# Altium PCB MSP430_Task.PcbDoc
Units mm, origin at the board's own origin, x right, y up, seen from the top; angles counter-clockwise.
Board outline 70 x 50 mm, 2 copper layers (Top Layer, Bottom Layer); 20 components, 13 nets, 152 pads, 25 vias.
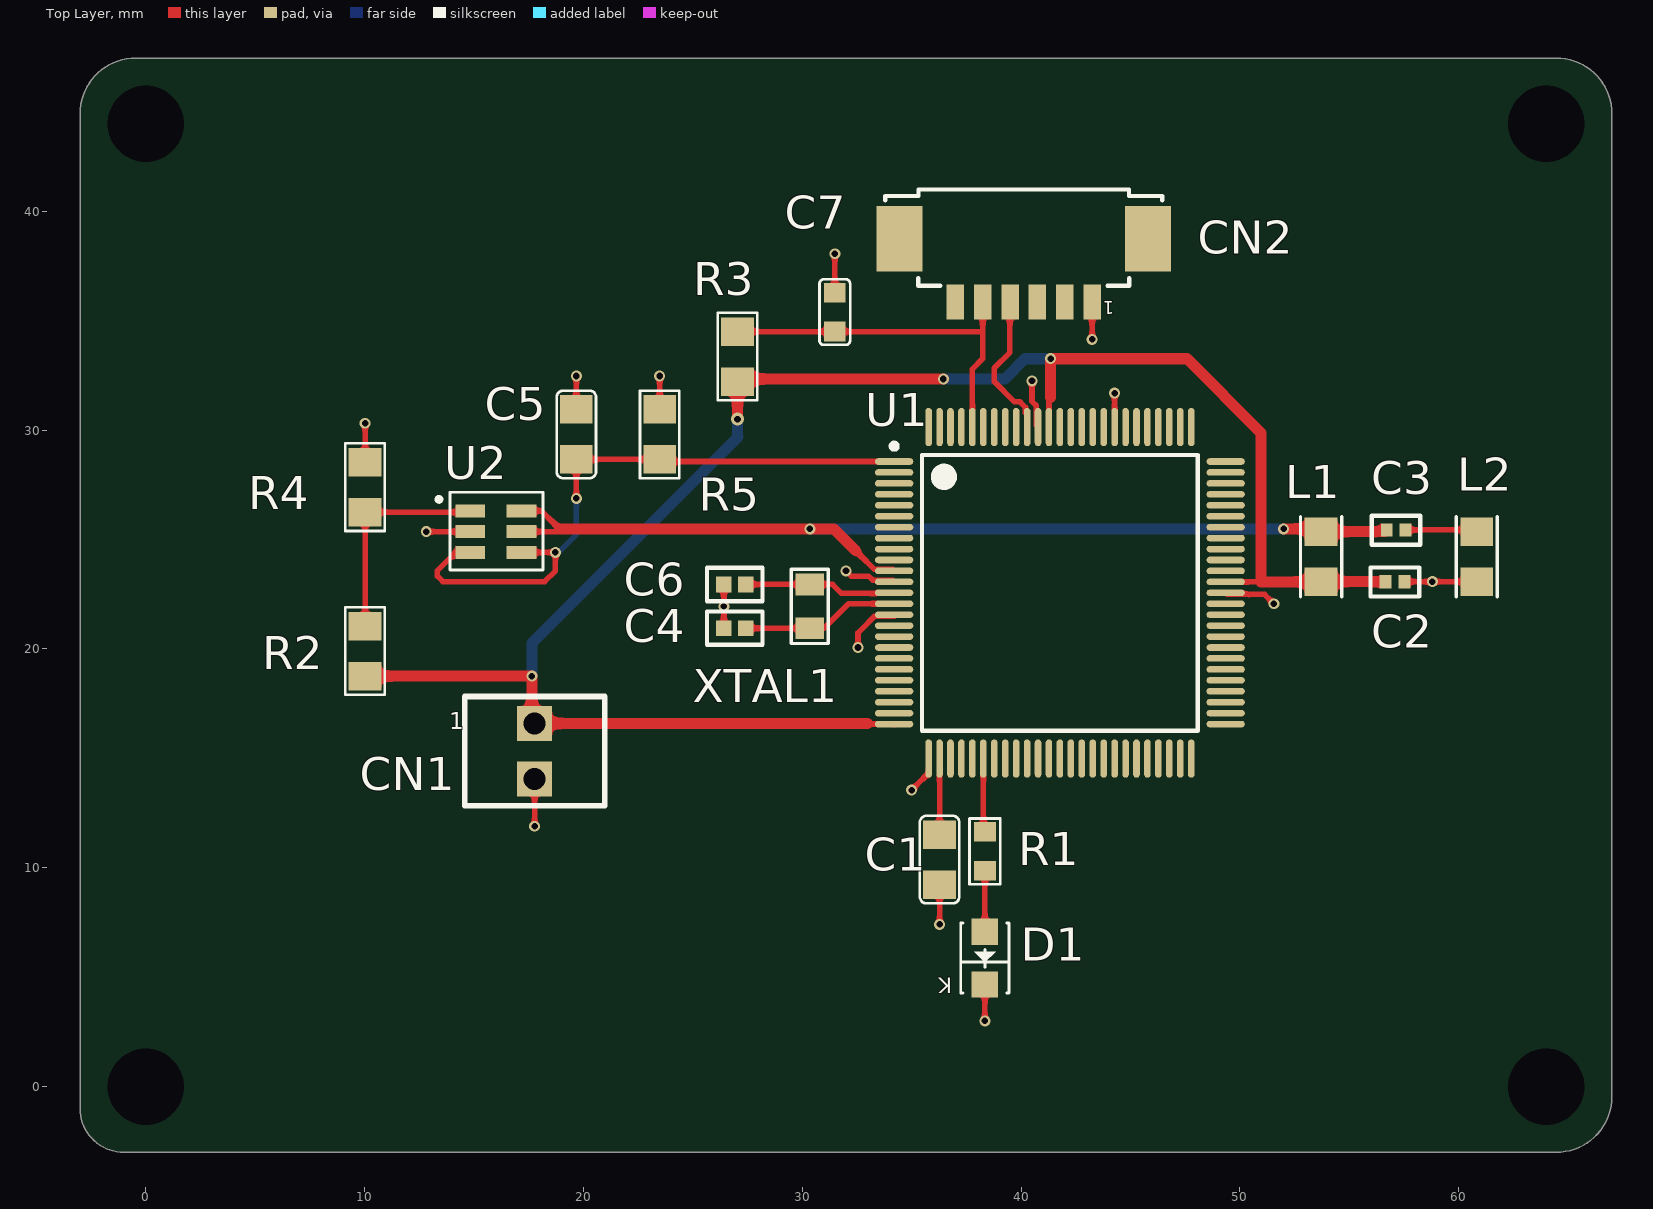
[diagram p0: Top Layer view]
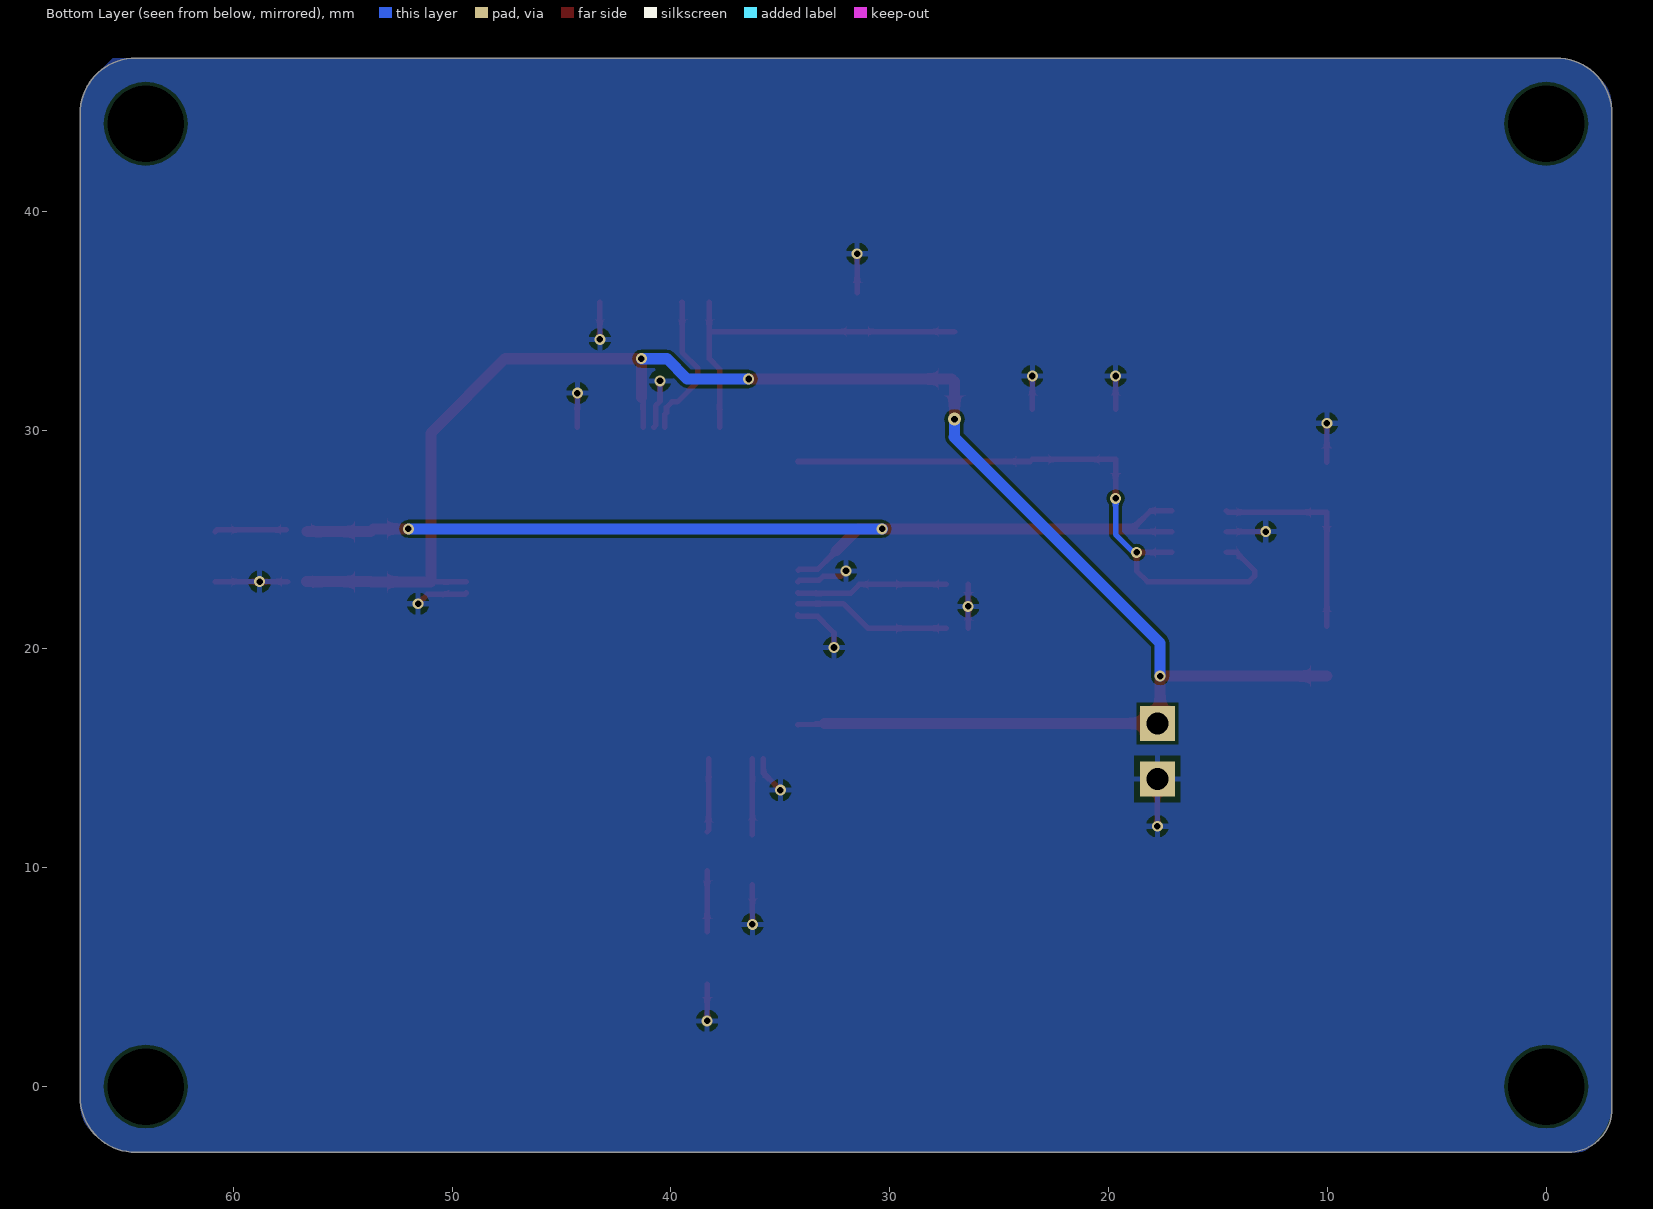
[diagram p1: Bottom Layer view, seen from below]
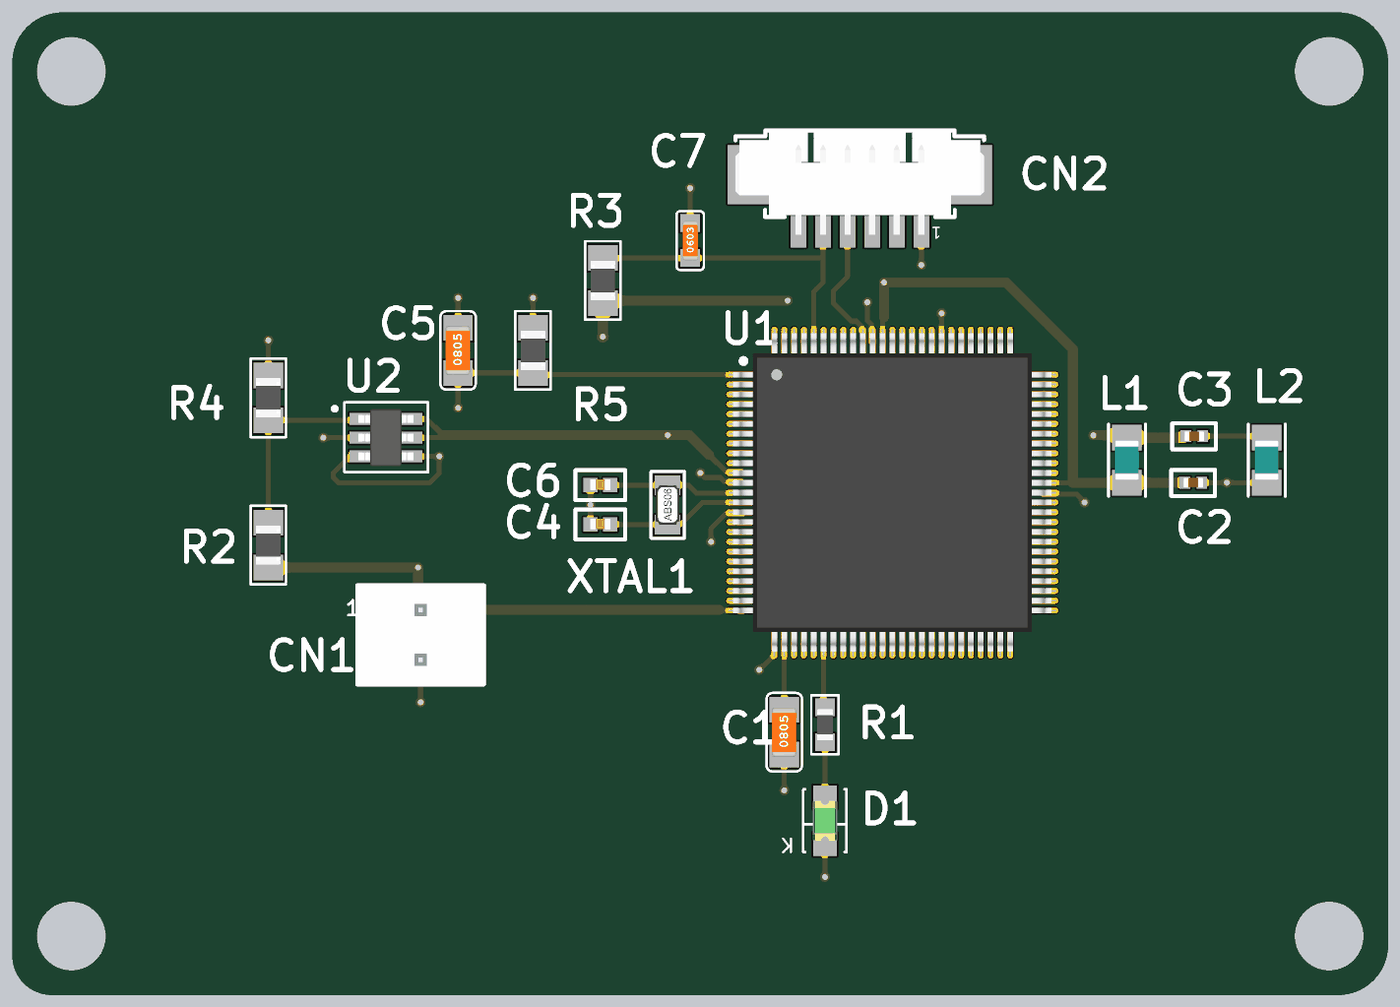
[diagram p2: 3D render of the assembled board from above, using the file's embedded part models]

## Layer stack, top to bottom
Top Solder: solder mask 0.0102, Solder Resist, Dk 3.5
Top Layer: signal copper 0.0356
Dielectric 1: dielectric 0.32, FR-4, Dk 4.8
Bottom Layer: signal copper 0.0356
Bottom Solder: solder mask 0.0102, Solder Resist, Dk 3.5

## Board outline
64.46,47 cw(c64.46,44.46) 67,44.46 67,-0.46 cw(c64.46,-0.46) 64.46,-3 -1,-3 cw(c-1,-1) -3,-1 -3,44.46 cw(c-0.46,44.46) -0.46,47 0,47

## Design rules (kind name [scope] priority, off if disabled: settings)
Clearance [All] p1: gap=0.15 ignorepadtopadclearanceinfootprint=FALSE
HoleSize [All] p1: absolutevalues=TRUE maxlimit=5 minlimit=0.3 maxpercent=80.000 minpercent=20.000
MinimumSolderMaskSliver [All] p1: minsoldermaskwidth=0.05
PolygonConnect [All] p1: connectstyle=Relief reliefconductorwidth=0.254 reliefentries=4 polygonreliefangle="90 Angle" airgapwidth=0.254
RoutingVias [All] p1: holewidth=0.3 width=0.5 viastyle="Through Hole" minholewidth=0.3 minwidth=0.3 maxholewidth=0.3 maxwidth=0.5
SilkToSolderMaskClearance [IsPad] p1: minsilkscreentomaskgap=0.01 clearancetoexposedcopper=TRUE
SolderMaskExpansion [All] p1: expansion=0.102
Width [All] p1: maxlimit=0.508 minlimit=0.254 preferedwidth=0.254
27 further rules are at their usual default settings.

## Components (designator, comment, footprint, x,y, rotation, side; value= is the part's Value field where it differs from the comment)
C1 "0.47uF/50V" C0805_MD 36.275,10.373 r90 top
C2 "2.2nF" GRM155R71C222KA01D 57.091,23.073 r180 top value=Value
C3 "2.2nF" GRM155R71C222KA01D 57.142,25.438 r180 top value=Value
C4 "12pF/50V" CAP_12PF 26.916,20.946 r0 top
C5 "0.1uF/25V" C0805_MD 19.677,29.804 r90 top
C6 "12pF/50V" CAP_12PF 26.916,22.946 r0 top
C7 "1nF/16V" C0603_MD 31.488,35.392 r90 top
CN1 "Header 2" "HEADER 2M 2.54MM 180 GRAUS" 17.772,15.326 r270 top
CN2 "Header 6H_PicoBlade" "PICO BLADE 0532610671" 40.124,37.297 r180 top
D1 "DNP" "L0805 GREEN" 38.346,5.871 r90 top
L1 "30R@100Mhz, 3A" L0805 53.713,24.216 r90 top
L2 "30R@100Mhz, 3A" L0805 60.825,24.216 r90 top
R1 "330" R0603_MD 38.346,10.754 r270 top
R2 "47K" R0805_MD 10.025,19.898 r90 top value=Value
R3 "47K" R0805_MD 27.043,33.36 r90 top value=Value
R4 "47K" R0805_MD 10.025,27.391 r90 top value=Value
R5 "1.65K" R0805_MD 23.487,29.804 r270 top
U1 "MSP430F6659IPZR" PZ0100A_N 41.775,22.565 r0 top
U2 "TLV341AIDBVR" TLV341AIDBVR 16,25.359 r0 top
XTAL1 "32.768kHz 12.5pF" "ABS06 0805" 30.345,21.946 r90 top

## Footprints (in the part's own frame and the unit in brackets; to place one, negate y for a bottom-side part, rotate by r counter-clockwise, add the part's x,y. Pads: shape width x height; smd on the part's side, far side on the other; paste and mask are expansions set on the pad)
"ABS06 0805" [mm]
  rect 1x1.3 smd: 1(-1,0) 2(1,0)
  silkscreen extent -1.7,-0.85 1.7,0.85, body extent -1,-0.61 1,0.61, height 0.6
C0603_MD [mm] "Chip Capacitor, Body 1.6x0.8mm, IPC Medium Density"
  rect 0.9x1 smd: 1(-0.889,0) 2(0.889,0)
  silkscreen extent -1.5,-0.7 1.5,0.7, body extent -1,-0.41 1,0.38, height 0.79
C0805_MD [mm] "Chip Capacitor, Body 2.0x1.3mm, IPC Medium Density"
  rect 1.3x1.5 smd: 1(-1.143,0) 2(1.143,0)
  silkscreen extent -2,-0.9 2,0.9, body extent -1.25,-0.61 1.25,0.64, height 0.79
CAP_12PF [mm]
  rect 0.72x0.72 smd: 1(-0.5,0) 2(0.5,0)
  silkscreen extent -1.27,-0.76 1.27,0.76, body extent -0.52,-0.25 0.52,0.3, height 0.56
GRM155R71C222KA01D [mm]
  rect 0.54x0.6 smd: 1(-0.432,0) 2(0.432,0)
  silkscreen extent -1.1,-0.65 1.12,0.67, body extent -0.5,-0.25 0.5,0.25, height 0.56
"HEADER 2M 2.54MM 180 GRAUS" [mm] "HEADER 3M 2.54mm 180 GRAUS"
  rect 1.6x1.6 hole 1: 1(-1.27,0) 2(1.27,0)
  silkscreen extent -2.5,-3.2 2.5,3.2, body extent -2.54,-3.25 2.54,3.1, height 10.68
L0805 [mm]
  rect 1.3x1.5 smd: 1(-1.143,0) 2(1.143,0)
  silkscreen extent -1.83,-0.94 1.83,0.94, body extent -1,-0.6 1,0.6, height 0.95
"L0805 GREEN" [mm]
  rect 1.2x1.2 smd paste+0: 1(1.2,0) 2(-1.2,0)
  silkscreen extent -1.6,-1.1 1.6,1.1, body extent -1.01,-0.62 1.01,0.63, height 1.1
"PICO BLADE 0532610671" [mm]
  rect 2.1x3 smd: 0(-5.675,-1.45) 0(5.675,-1.45)
  rect 0.8x1.6 smd: 1(-3.125,1.45) 2(-1.875,1.45) 3(-0.625,1.45) 4(0.625,1.45) 5(1.875,1.45) 6(3.125,1.45)
  silkscreen extent -6.33,-3.7 6.32,0.7, body extent -6.32,-3.6 6.33,1.6, height 3.5
PZ0100A_N [mm]
  oval 1.75x0.3 smd paste-0.102 mask+0.051: 1(-7.575,6) 2(-7.575,5.5) 3(-7.575,5) 4(-7.575,4.5) 5(-7.575,4) 6(-7.575,3.5) 7(-7.575,3) 8(-7.575,2.5) 9(-7.575,2) 10(-7.575,1.5) 11(-7.575,1) 12(-7.575,0.5) 13(-7.575,0) 14(-7.575,-0.5) 15(-7.575,-1) 16(-7.575,-1.5) 17(-7.575,-2) 18(-7.575,-2.5) 19(-7.575,-3) 20(-7.575,-3.5) 21(-7.575,-4) 22(-7.575,-4.5) 23(-7.575,-5) 24(-7.575,-5.5) 25(-7.575,-6) 51(7.575,-6) 52(7.575,-5.5) 53(7.575,-5) 54(7.575,-4.5) 55(7.575,-4) 56(7.575,-3.5) 57(7.575,-3) 58(7.575,-2.5) 59(7.575,-2) 60(7.575,-1.5) 61(7.575,-1) 62(7.575,-0.5) 63(7.575,0) 64(7.575,0.5) 65(7.575,1) 66(7.575,1.5) 67(7.575,2) 68(7.575,2.5) 69(7.575,3) 70(7.575,3.5) 71(7.575,4) 72(7.575,4.5) 73(7.575,5) 74(7.575,5.5) 75(7.575,6)
  oval 0.3x1.75 smd paste-0.102 mask+0.051: 26(-6,-7.575) 27(-5.5,-7.575) 28(-5,-7.575) 29(-4.5,-7.575) 30(-4,-7.575) 31(-3.5,-7.575) 32(-3,-7.575) 33(-2.5,-7.575) 34(-2,-7.575) 35(-1.5,-7.575) 36(-1,-7.575) 37(-0.5,-7.575) 38(0,-7.575) 39(0.5,-7.575) 40(1,-7.575) 41(1.5,-7.575) 42(2,-7.575) 43(2.5,-7.575) 44(3,-7.575) 45(3.5,-7.575) 46(4,-7.575) 47(4.5,-7.575) 48(5,-7.575) 49(5.5,-7.575) 50(6,-7.575) 76(6,7.575) 77(5.5,7.575) 78(5,7.575) 79(4.5,7.575) 80(4,7.575) 81(3.5,7.575) 82(3,7.575) 83(2.5,7.575) 84(2,7.575) 85(1.5,7.575) 86(1,7.575) 87(0.5,7.575) 88(0,7.575) 89(-0.5,7.575) 90(-1,7.575) 91(-1.5,7.575) 92(-2,7.575) 93(-2.5,7.575) 94(-3,7.575) 95(-3.5,7.575) 96(-4,7.575) 97(-4.5,7.575) 98(-5,7.575) 99(-5.5,7.575) 100(-6,7.575)
  silkscreen extent -7.7,-6.3 6.3,6.82, body extent -8.1,-8.1 8.1,8.1, height 1.6
R0603_MD [mm] "Chip Resistor, Body 1.6x0.8mm, IPC Medium Density"
  rect 0.9x1 smd: 1(-0.889,0) 2(0.889,0)
  silkscreen extent -1.5,-0.7 1.5,0.7, body extent -0.8,-0.4 0.8,0.4, height 0.37
R0805_MD [mm] "Chip Resistor, Body 2.0x1.3mm, IPC Medium Density"
  rect 1.3x1.5 smd: 1(-1.143,0) 2(1.143,0)
  silkscreen extent -2,-0.9 2,0.9, body extent -1,-0.62 1,0.63, height 0.47
TLV341AIDBVR [mm]
  rect 1.36x0.6 smd: 1(-1.175,0.95) 2(-1.175,0) 3(-1.175,-0.95) 4(1.175,-0.95) 5(1.175,0) 6(1.175,0.95)
  silkscreen extent -2.7,-1.75 2.15,1.8, body extent -1.4,-1.45 1.4,1.45, height 1.2

## Part data
C1: library part Cap_Cer_X7R_0.47uF_50V_0805, "CAP CER 0.47UF 50V 10% X7R 0805", Partnumber=C0805C474K5RACTU, NCM=8532.24.10
C2 C3: library part "Cap 2.2nF/16V_0402", "Imported", Case/Package=0402, Case Code (Metric)=1005, Dielectric=X7R, Manufacturer=Murata, Manufacturer_Part_Number=GRM155R71C222KA01D, Max Operating Temperature=125°C, Min Operating Temperature=-55°C, Package Quantity=10000, Supplier Part Number 1=490-6330-1-ND, Tolerance=10%, Voltage Rating=16V, Built_By=EMA_UL_Team, C="Copyright (C) 2015 Accelerated Designs. All rights reserved", Capacitance=2.2nF, Case Code (Imperial)=0402, ComponentLink1Description=https://datasheet.ciiva.com/5412/product-5412216.pdf, ComponentLink1URL=https://datasheet.ciiva.com/5412/product-5412216.pdf, ComponentLink2Description=https://datasheet.ciiva.com/6263/partnumbering-e-01-6263624.pdf, ComponentLink2URL=https://datasheet.ciiva.com/6263/partnumbering-e-01-6263624.pdf, ComponentLink3Description=https://datasheet.ciiva.com/6263/partnumbering-e-01-6263627.pdf, ComponentLink3URL=https://datasheet.ciiva.com/6263/partnumbering-e-01-6263627.pdf, ComponentLink4Description=https://datasheet.ciiva.com/17453/product-17453067.pdf, ComponentLink4URL=https://datasheet.ciiva.com/17453/product-17453067.pdf, ComponentLink5Description=https://datasheet.ciiva.com/11620/product-11620860.pdf, ComponentLink5URL=https://datasheet.ciiva.com/11620/product-11620860.pdf, ComponentLink6Description=https://datasheet.ciiva.com/6263/partnumbering-e-01-6263630.pdf, ComponentLink6URL=https://datasheet.ciiva.com/6263/partnumbering-e-01-6263630.pdf, Depth=0.5mm, Height=0.5mm, Lead Free="Lead Free", Length=1mm, Manufacturer Part Number=GRM155R71C222KA01D, Mount="Surface Mount", Packaging="Tape and Reel", Pricing 1="1=0.1, 10=0.03, 100=0.0134, 500=0.0096, 1000=0.0075, 2500=0.0068, 5000=0.0063 (USD)", Radiation Hardening=No, RefDes=RefDes, Stock 1=125973, Supplier 1=Digi-Key, Termination=SMD/SMT, Thickness=0.022inch, Type=DEV, Vendor=Murata, Voltage Rating (DC)=16V, Width=0.02inch
C4 C6: library part CBR04C120F5GAC, "KEMET - CBR04C120F5GAC - Capacitor, RF, C0G / NP0, 12 pF, 50 V, HiQ-CBR Series, ± 1%, 125 °C, 0402 [1005 Metric]", Capacitance=12pF, Case/Package=0402, Case Code (Metric)=1005, Dielectric=C0G, Manufacturer=KEMET, Max Operating Temperature=125°C, Min Operating Temperature=-55°C, Package Quantity=1, Supplier Part Number 1=27AC1397, Tolerance=1%, Voltage Rating=50V, Case Code (Imperial)=0402, ComponentLink1Description=https://api.kemet.com/component-edge/download/datasheet/CBR04C120F5GAC.pdf?src-supplier=Digi-Key, ComponentLink1URL=https://api.kemet.com/component-edge/download/datasheet/CBR04C120F5GAC.pdf?src-supplier=Digi-Key, Contact Plating=Tin,Matte, Length=0.039inch, Manufacturer Part Number=CBR04C120F5GAC, Mount="Surface Mount", Packaging="Tape and Reel", Stock 1=0, Supplier 1=Newark, Termination=Wraparound, Thickness=0.022inch, Voltage Rating (DC)=50V, Width=0.02inch
C5: library part Cap_Cer_X7R_0.1uF_25V_0805, "CAP CER 0.1UF 25V 10% X7R 0805", Partnumber=CC0805KRX7R8BB104, NCM=8532.24.10
C7: library part Cap_Cer_X7R_1nF_16V_0603, "CAP CER 1nF 16V 0603 5%", Partnumber=C0603X102J4RECAUTO, NCM=8532.24.10
CN1: "Header, 2-Pin", Partnumber=826646-2, LatestRevisionDate=17-Jul-2002, LatestRevisionNote="Re-released for DXP Platform.", Publisher="Altium Limited"
CN2: "Header, 6-Pin, Right Angle", Partnumber=53398-0671, LatestRevisionDate=17-Jul-2002, LatestRevisionNote="Re-released for DXP Platform.", Publisher="Altium Limited"
D1: library part LED/G_0805, "SMD Green LED", Partnumber=LTST-C171GKT, NCM=8541.40.21
L1 L2: library part FB_30R_3A_100MHz_0805, "Ferrite Bead 30 OHM 3A 100MHz", Partnumber=BLM21PG300SN1D, NCM=8504.50.00
R1: library part "Resistor 330", Case/Package=0603, Case Code (Metric)=1608, Manufacturer=Vishay, Manufacturer Part Number=CRCW0603330RFKEAHP, Max Operating Temperature=155°C, Max Power Dissipation=250mW, Min Operating Temperature=-55°C, Package Quantity=1, Resistance=330R, Supplier Part Number 1=541-330SCT-ND, Temperature Coefficient=100ppm/°C, Tolerance=1%, Voltage Rating=75V, Case Code (Imperial)=0603, ComponentLink1Description=https://datasheet.ciiva.com/48524/crcwhpe3-48524918.pdf, ComponentLink1URL=https://datasheet.ciiva.com/48524/crcwhpe3-48524918.pdf, ComponentLink2Description=https://datasheet.ciiva.com/8944/crcwhpe3-8944983.pdf, ComponentLink2URL=https://datasheet.ciiva.com/8944/crcwhpe3-8944983.pdf, ComponentLink3Description=https://datasheet.ciiva.com/6551/crcwhpe3-6551640.pdf, ComponentLink3URL=https://datasheet.ciiva.com/6551/crcwhpe3-6551640.pdf, ComponentLink4Description=https://datasheet.ciiva.com/6551/crcwhpe3-6551641.pdf, ComponentLink4URL=https://datasheet.ciiva.com/6551/crcwhpe3-6551641.pdf, ComponentLink5Description=https://datasheet.ciiva.com/6551/crcwhpe3-6551644.pdf, ComponentLink5URL=https://datasheet.ciiva.com/6551/crcwhpe3-6551644.pdf, ComponentLink6Description=https://datasheet.ciiva.com/16884/crcwhpe3-16884876.pdf, ComponentLink6URL=https://datasheet.ciiva.com/16884/crcwhpe3-16884876.pdf, ComponentLink7Description=https://datasheet.ciiva.com/12664/crcwhpe3-46056-12664527.pdf, ComponentLink7URL=https://datasheet.ciiva.com/12664/crcwhpe3-46056-12664527.pdf, Composition="Thick Film", Contact Plating=Tin, Depth=0.85mm, Height=0.45mm, Lead Free="Lead Free", Length=1.6mm, Military Standard=Not, Mount="Surface Mount", Number of Terminations=2, Packaging="Tape and Reel", Power Rating=250mW, Pricing 1="1=0.18, 10=0.156, 100=0.0609, 1000=0.0255, 2500=0.0234 (USD)", Radiation Hardening=No, REACH SVHC=Unknown, Stock 1=0, Supplier 1=Digi-Key, Termination=SMD/SMT, Voltage Rating (DC)=75V, Weight=7.1E-05oz, Width=0.033inch
R2 R3 R4: library part "Resistor 47 Kohms", "Imported", Case/Package=0805, Case Code (Metric)=2012, Manufacturer="Panasonic ECG", Manufacturer_Part_Number=ERA-6AEB473V, Max Operating Temperature=155°C, Max Power Dissipation=125mW, Min Operating Temperature=-55°C, Package Quantity=1, Resistance=47kR, Supplier Part Number 1=P47KDACT-ND, Temperature Coefficient=25ppm/°C, Tolerance=0.1%, Voltage Rating=100V, Built_By=EMA_UL_Team, C="Copyright (C) 2015 Accelerated Designs. All rights reserved", Case Code (Imperial)=0805, ComponentLink1Description=https://datasheet.ciiva.com/6138/485442-6138021.pdf, ComponentLink1URL=https://datasheet.ciiva.com/6138/485442-6138021.pdf, ComponentLink2Description=https://datasheet.ciiva.com/16759/70068849-16759926.pdf, ComponentLink2URL=https://datasheet.ciiva.com/16759/70068849-16759926.pdf, ComponentLink3Description=https://datasheet.ciiva.com/22740/485442-22740326.pdf, ComponentLink3URL=https://datasheet.ciiva.com/22740/485442-22740326.pdf, ComponentLink4Description=https://datasheet.ciiva.com/30061/54aoa0000ce26-30061799.pdf, ComponentLink4URL=https://datasheet.ciiva.com/30061/54aoa0000ce26-30061799.pdf, ComponentLink5Description=https://datasheet.ciiva.com/11812/0900766b80beefcc-11812472.pdf, ComponentLink5URL=https://datasheet.ciiva.com/11812/0900766b80beefcc-11812472.pdf, ComponentLink6Description=https://datasheet.ciiva.com/7802/485442-7802329.pdf, ComponentLink6URL=https://datasheet.ciiva.com/7802/485442-7802329.pdf, ComponentLink7Description=https://datasheet.ciiva.com/16774/70068849-16774537.pdf, ComponentLink7URL=https://datasheet.ciiva.com/16774/70068849-16774537.pdf, ComponentLink8Description=https://datasheet.ciiva.com/48425/era-eng-tds-48425610.pdf, ComponentLink8URL=https://datasheet.ciiva.com/48425/era-eng-tds-48425610.pdf, ComponentLink9Description=https://datasheet.ciiva.com/17209/aoa0000ce26-17209676.pdf, ComponentLink9URL=https://datasheet.ciiva.com/17209/aoa0000ce26-17209676.pdf, ComponentLink10Description=https://datasheet.ciiva.com/43455/485442-43455277.pdf, ComponentLink10URL=https://datasheet.ciiva.com/43455/485442-43455277.pdf, ComponentLink11Description=https://datasheet.ciiva.com/48530/era-eng-tds-48530030.pdf, ComponentLink11URL=https://datasheet.ciiva.com/48530/era-eng-tds-48530030.pdf, ComponentLink12Description=https://datasheet.ciiva.com/26335/453548-da-01-en-widerstand-0805-era-26335717.pdf, ComponentLink12URL=https://datasheet.ciiva.com/26335/453548-da-01-en-widerstand-0805-era-26335717.pdf, Composition="Metal Film,Thin Film", Contact Plating=Tin, Depth=1.25mm, Height=0.5mm, Lead Free="Lead Free", Length=2mm, Manufacturer Part Number=ERA-6AEB473V, Military Standard=Not, Mount="Surface Mount", Number of Pins=2, Number of Terminations=2, Packaging="Tape and Reel", Power Rating=125mW, Pricing 1="1=0.36, 10=0.302, 100=0.1182, 1000=0.0495, 2500=0.0454 (USD)", Radiation Hardening=No, REACH SVHC="No SVHC", RefDes=RefDes, Stock 1=186891, Supplier 1=Digi-Key, Termination=SMD/SMT, Type=DEV, Vendor=Panasonic, Voltage Rating (DC)=100V, Weight=0.000194oz, Width=1.25mm
R5: library part R1.65K_1%_1/10W_0805, "RES 1.65K OHM 1/10W 0.1% 0805", Partnumber=PCF0805R-1K65BT1, NCM=8533.21.20
U1: Case/Package=LQFP, Frequency=20MHz, Manufacturer="Texas Instruments", Max Operating Temperature=85°C, Max Supply Voltage=3.6V, Min Operating Temperature=-40°C, Min Supply Voltage=1.8V, Package Quantity=1000, Supplier Part Number 1=296-51438-1-ND, ComponentLink1Description=http://www.ti.com/lit/ds/symlink/msp430f6659.pdf?src-supplier=Digi-Key, ComponentLink1URL=http://www.ti.com/lit/ds/symlink/msp430f6659.pdf?src-supplier=Digi-Key, ComponentLink2Description=http://www.ti.com/lit/ds/symlink/msp430f5659.pdf?src-supplier=Avnet, ComponentLink2URL=http://www.ti.com/lit/ds/symlink/msp430f5659.pdf?src-supplier=Avnet, Core Architecture=RISC, Data Bus Width=16b, Interface=SPI,USB,UART,I2C,IrDA,USART,SCI, Lead Free="Lead Free", Manufacturer Part Number=MSP430F6659IPZR, Max Frequency=20MHz, Memory Size=512KB, Memory Type=FLASH, Mount="Surface Mount", Number of A/D Converters=16, Number of I/Os=74, Number of Pins=100, Number of Programmable I/O=74, Number of Timers/Counters=4, Number of UART Channels=3, Oscillator Type=Internal, Packaging="Tape and Reel", Peripherals="Brown-out Detect/Reset,POR,PWM,WDT,DMA,LCD", Pricing 1="1=11.93, 10=10.968, 25=10.5136, 100=9.2633, 250=8.80864, 500=8.24036 (USD)", Radiation Hardening=No, RAM Size=64KB, Stock 1=497, Stock 2=0, Supplier 1=Digi-Key, Supplier 2=Mouser, Supplier Part Number 2=595-MSP430F6659IPZR, Watchdog Timer=Yes
U2: Supplier Part Number 1=73J8352, Partnumber=TLV341AIDBVR, Supplier 1=Newark
XTAL1: library part Xtal_32.768kHz_12pF_2_SMD, "32.768kHz ±20ppm Crystal 12.5pF 70 kOhm -40°C ~ 125°C", Partnumber=ECS-.327-12.5-34S-TR, NCM=8541.60.10

## Free pads (board coordinates)
  round 1.524 hole 3.5 unplated: ""(0,0) ""(0,44) ""(64,0) ""(64,44)

## Via types
v1: diameter 0.5, hole 0.3, Top Layer to Bottom Layer, tented top, 24 vias
v2: diameter 0.6, hole 0.3, Top Layer to Bottom Layer, tented top, 1 vias

## Nets (pads, with @x,y where several pads share a name; then routed paths per layer and width w, separated by ;. In a path a pad name is that pad's centre, name@x,y a point inside that pad or via, vN(x,y) a via of type N, cw(c..) or ccw(c..) an arc to the next point about the centre after c; other vN are vias at no path point)
AGND: C3.1 L2.2 | length 3.3
  Top Layer w0.254: C3.1 60.746,25.438 L2.2
DNP: D1.1 R1.2 | length 2.8
  Top Layer w0.254: D1.1 R1.2
GND: C1.1 C2.1 C4.1 C5.2 C6.1 C7.2 CN1.2 CN2.1 D1.2 L2.1 R4.2 R5.1 U1.12 U1.15 U1.26 U1.63 U1.83 U1.90 U2.2 | length 34.1
  Top Layer w0.254: R4.2 v1(10.025,30.312) ; v1(12.819,25.359) U2.2@14.612,25.359 ; v1(17.772,11.897) CN1.2 ; C5.2 v1(19.677,32.471) ; R5.1 v1(23.487,32.471) ; C4.1 v1(26.416,21.946) C6.1 ; C7.2 v1(31.488,38.059) ; v1(32,23.565) 32.238,23.327 33.038,23.327 33.227,23.138 34.127,23.138 U1.12 ; v1(32.548,20.065) 32.548,20.736 33.048,21.236 33.048,21.242 33.298,21.492 34.2,21.492 U1.15 ; v1(35,13.548) 35.775,14.323 U1.26 ; v1(36.275,7.413) C1.1 ; v1(38.346,3.007) D1.2 ; v1(40.5,32.25) 40.5,31.315 40.702,31.113 40.702,30.213 U1.90 ; v1(43.249,34.148) CN2.1 ; U1.83 v1(44.275,31.693) ; U1.63 49.423,22.492 51.127,22.492 v1(51.554,22.065) ; C2.1 v1(58.793,23.073) L2.1
JTAG_TCK: CN2.4 U1.91 | length 6.8
  Top Layer w0.254: CN2.4 39.489,35.837 39.489,33.551 38.775,32.837 38.775,32.217 39.7,31.292 39.952,31.292 40.202,31.042 40.202,30.79 40.275,30.717 U1.91
JTAG_TDO_TDI: C7.1 CN2.5 R3.2 U1.96 | length 17.1
  Top Layer w0.254: R3.2 C7.1 38.197,34.503 38.249,34.555 ; U1.96 37.775,32.09 37.775,32.789 38.249,33.263 38.249,34.555 ; CN2.5 38.249,34.555
NetC1_2: C1.2 U1.27 | length 3.5
  Top Layer w0.254: C1.2 U1.27
NetR2_2: R2.2 R4.1 U2.1 | length 9.8
  Top Layer w0.254: R2.2 R4.1 14.551,26.248 U2.1@14.612,26.309
OBDH_AVCC: C3.2 L1.2 U1.11 U2.5 U2.6 | length 46.5
  Top Layer w0.254: U2.5@17.122,25.359 U2.5 18.788,25.359 18.915,25.486 18.092,26.309 U2.6 U2.6@17.122,26.309 ; 32.436,24.5 33.298,23.638 34.127,23.638 U1.11@34.173,23.592 ; L1.2@53.586,25.486 L1.2 ; C3.2@56.631,25.359 C3.2
  Top Layer w0.508: 18.915,25.486 v1(30.345,25.486) 31.45,25.486 32.436,24.5 ; v1(52,25.486) L1.2@53.586,25.486 ; L1.2 C3.2@56.631,25.359
  Bottom Layer w0.508: v1(30.345,25.486) v1(52,25.486)
OBDH_DVCC: C2.2 CN1.1 L1.1 R2.1 R3.1 U1.25 U1.64 U1.89 | length 86.5
  Top Layer w0.254: CN1.1@17.645,16.723 CN1.1 ; R3.1 R3.1@27.162,32.336 ; 33,16.565 U1.25@34.199,16.534 ; U1.89 41.275,31.427 ; U1.64 50.954,23.065 50.962,23.073 ; L1.1@53.705,23.065 L1.1
  Top Layer w0.508: R2.1 v1(17.645,18.755) CN1.1@17.645,16.723 ; CN1.1 32.969,16.596 ; v2(27.043,30.5) R3.1 ; R3.1@27.162,32.336 v1(36.449,32.336) ; 41.348,31.5 v1(41.348,33.263) 47.573,33.263 50.962,29.874 50.962,23.073 ; 50.962,23.065 L1.1@53.705,23.065 ; L1.1 C2.2
  Bottom Layer w0.508: v1(17.645,18.755) 17.645,20.279 27.058,29.692 27.043,29.707 v2(27.043,30.5) ; v1(36.449,32.336) 39.255,32.336 40.182,33.263 v1(41.348,33.263)
OBDH_VOLTAGE_ADC: C5.1 R5.2 U1.1 U2.3 U2.4 | length 29.4
  Top Layer w0.254: U2.3@14.612,24.409 14.155,24.409 13.327,23.581 13.327,23.327 13.581,23.073 18.23,23.073 18.722,23.565 v1(18.722,24.409) U2.4 U2.4@17.122,24.409 ; v1(19.677,26.883) C5.1 R5.2 23.583,28.565 U1.1
  Bottom Layer w0.254: v1(18.722,24.409) 18.788,24.343 19.677,25.232 v1(19.677,26.883)
SYSTEM_LED: R1.1 U1.31 | length 3.4
  Top Layer w0.254: U1.31 38.275,11.714 R1.1
XTIIN: C4.2 U1.14 XTAL1.1 | length 7.2
  Top Layer w0.254: C4.2 XTAL1.1 31.004,20.946 32.123,22.065 U1.14
XTIOUT: C6.2 U1.13 XTAL1.2 | length 7
  Top Layer w0.254: C6.2 XTAL1.2 31.385,22.946 31.793,22.538 34.173,22.538 U1.13
pads on no net: CN2.0 CN2.2 CN2.3 CN2.6 U1.2 U1.3 U1.4 U1.5 U1.6 U1.7 U1.8 U1.9 U1.10 U1.16 U1.17 U1.18 U1.19 U1.20 U1.21 U1.22 U1.23 U1.24 U1.28 U1.29 U1.30 U1.32 U1.33 U1.34 U1.35 U1.36 U1.37 U1.38 U1.39 U1.40 U1.41 U1.42 U1.43 U1.44 U1.45 U1.46 U1.47 U1.48 U1.49 U1.50 U1.51 U1.52 U1.53 U1.54 U1.55 U1.56 U1.57 U1.58 U1.59 U1.60 U1.61 U1.62 U1.65 U1.66 U1.67 U1.68 U1.69 U1.70 U1.71 U1.72 U1.73 U1.74 U1.75 U1.76 U1.77 U1.78 U1.79 U1.80 U1.81 U1.82 U1.84 U1.85 U1.86 U1.87 U1.88 U1.92 U1.93 U1.94 U1.95 U1.97 U1.98 U1.99 U1.100

## Polygon pours and split planes (outlines as drawn)
GND on Bottom Layer "Bottom Layer-GND" (solid, pour order 58): -0.448,47 ccw(c-0.448,44.46) -2.244,46.256 -2.5,46 ccw(c-1.293,44.793) -3,44.793 -3,-0.698 ccw(c-0.46,-0.698) -2.256,-2.494 -2,-2.75 ccw(c-1.396,-2.146) -1.396,-3 64.448,-3 ccw(c64.448,-0.46) 66.244,-2.256 66.5,-2 ccw(c65.293,-0.793) 67,-0.793 67,44.448 ccw(c64.46,44.448) 66.256,46.244 65.5,47
no net on Bottom Layer "Bottom Layer-No Net" (solid, pour order 52): -12.5,36.5
no net on Bottom Layer "Bottom Layer-No Net 1" (solid, pour order 50): -6,42.5
GND on Bottom Layer "Bottom Layer-GND 2" (solid, pour order 34): 1,43
GND on Bottom Layer "Bottom Layer-GND 3" (solid, pour order 32): 12,52
GND on Bottom Layer "Bottom Layer-GND 4" (solid, pour order 30): -1,37
GND on Bottom Layer "Bottom Layer-GND 5" (solid, pour order 22): 10.025,31.693
GND on Bottom Layer "Bottom Layer-GND 6" (solid, pour order 20): -8,48
GND on Bottom Layer "Bottom Layer-GND 1" (solid, pour order 10): 64,44.5

## Silkscreen, mask and mechanical layers (free items; w line width, h text height)
Assembly:
  lines w0.1: -3,-3 -3,47 67,47 67,-3 -3,-3

## Dimensions
0.25,47 to -0.75,-3 on Dimensions (Mech16)
-2.75,-3.254 to 67.25,-3 on Dimensions (Mech16)

## Text inside footprints (layer, text, board x,y; h text height)
CN1: Top Overlay "1" at 13.872,16.326 h0.76
CN2: Top Overlay "1" at 44.249,36.097 h1 r180
D1: Top Overlay "K" at 36.846,4.971 h0.7 r180